# Altium PCB 74HC595_Pcb.PcbDoc
Units mil, origin at the board's own origin, x right, y up, seen from the top; angles counter-clockwise.
Board outline 600 x 800 mil, 2 copper layers (Top Layer, Bottom Layer); 4 components, 16 nets, 34 pads, 1 vias.
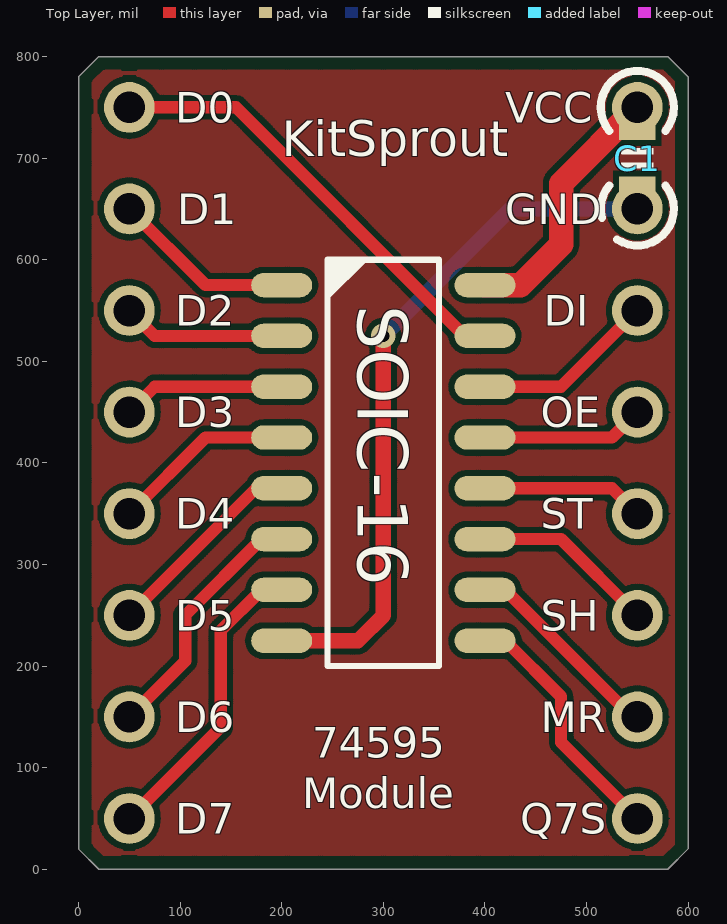
[diagram p0: Top Layer view]
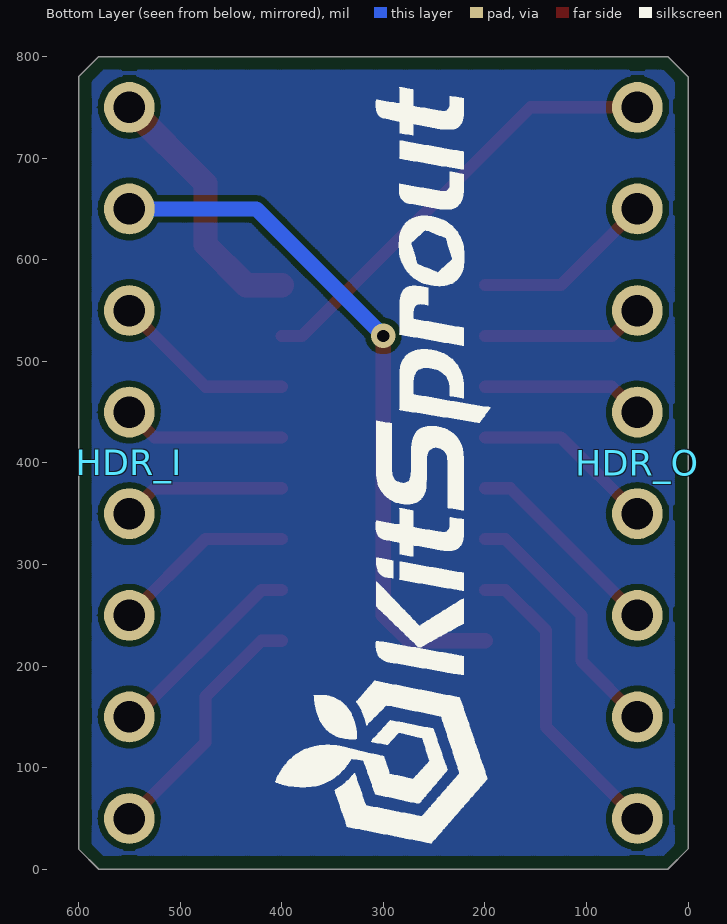
[diagram p1: Bottom Layer view, seen from below]

## Layer stack, top to bottom
Top Solder: solder mask 0.4, Solder Resist, Dk 3.5
Top Layer: signal copper 1.4
Dielectric1: dielectric 12.6, FR-4, Dk 4.8
Bottom Layer: signal copper 1.4
Bottom Solder: solder mask 0.4, Solder Resist, Dk 3.5

## Board outline
0,20 0,780 20,800 580,800 600,780 600,20 580,0 20,0

## Design rules (kind name [scope] priority, off if disabled: settings)
Clearance ClearancePolygon [InPolygon] p1: gap=6
Clearance [All] p2: gap=6
ComponentClearance [All] p1: gap=0 collisioncheckmode=3 verticalgap=0 showdistances=FALSE
Height [All] p1: minheight=0 maxheight=5000 prefheight=500
HoleToHoleClearance [All] p1: gap=6 allowstackedmicrovias=TRUE
MinimumSolderMaskSliver [All] p1: minsoldermaskwidth=6
PlaneConnect [All] p1: planeconnectstyle=Direct reliefexpansion=20 reliefentries=4 reliefconductorwidth=20 reliefairgap=10
PolygonConnect [All] p1: connectstyle=Direct reliefconductorwidth=20 reliefentries=4 polygonreliefangle="90 Angle" airgapwidth=10
RoutingVias [All] p1: holewidth=12 width=20 viastyle="Through Hole" minholewidth=12 minwidth=20 maxholewidth=100 maxwidth=200
SilkToSilkClearance [All] p1: silktosilkclearance=0
SilkToSolderMaskClearance SilkscreenOverComponentPads [IsPad] p1: minsilkscreentomaskgap=1 clearancetoexposedcopper=TRUE
SolderMaskExpansion [All] p1: expansion=2
Width [All] p1: maxlimit=30 minlimit=6 preferedwidth=10
22 further rules are at their usual default settings.

## Components (designator, comment, footprint, x,y, rotation, side; value= is the part's Value field where it differs from the comment)
C1 "Cap_0603" CAP_0603 550,700 r90 top
HDR_I "HDR1x8_2.54" HDR1X8_2.54_180 550,750 r180 bottom
HDR_O "HDR1x8_2.54" HDR1X8_2.54_180 50,750 r180 bottom
SOIC-16 "74HC595" SOIC_E150_16 300,400 r0 top (schematic designator 74S)

## Footprints (in the part's own frame and the unit in brackets; to place one, negate y for a bottom-side part, rotate by r counter-clockwise, add the part's x,y. Pads: shape width x height; smd on the part's side, far side on the other; paste and mask are expansions set on the pad)
CAP_0603 [mil]
  rect 28x36 smd: 1(-32,0) 2(32,0)
  silkscreen extent -10,-16 10,16, body extent -31,-16 32,16, height 36
HDR1X8_2.54_180 [mil]
  round 50 hole 31: 1(0,0) 2(0,-100) 3(0,-200) 4(0,-300) 5(0,-400) 6(0,-500) 7(0,-600) 8(0,-700)
  body extent -49,-750 49,50, height 323
SOIC_E150_16 [mil]
  oval 60x24 smd: 1(-100,175) 2(-100,125) 3(-100,75) 4(-100,25) 5(-100,-25) 6(-100,-75) 7(-100,-125) 8(-100,-175) 9(100,-175) 10(100,-125) 11(100,-75) 12(100,-25) 13(100,25) 14(100,75) 15(100,125) 16(100,175)
  silkscreen extent -55,-200 55,200, body extent -118,-197 118,197, height 69

## Part data
C1: "Capacitor"
HDR_I: library part HDR1x8_2.54T, "Header"
HDR_O: "Header"
SOIC-16: "74 Series"

## Via types
v1: diameter 24, hole 12, Top Layer to Bottom Layer, 1 vias

## Nets (pads, with @x,y where several pads share a name; then routed paths per layer and width w, separated by ;. In a path a pad name is that pad's centre, name@x,y a point inside that pad or via, vN(x,y) a via of type N, cw(c..) or ccw(c..) an arc to the next point about the centre after c; other vN are vias at no path point)
D0: HDR_O.1 SOIC-16.15 | length 443.2
  Top Layer w12: HDR_O.1 155,750 380,525 SOIC-16.15
D1: HDR_O.2 SOIC-16.1 | length 181.1
  Top Layer w12: HDR_O.2 125,575 SOIC-16.1
D2: HDR_O.3 SOIC-16.2 | length 160.4
  Top Layer w12: HDR_O.3 75,525 SOIC-16.2
D3: HDR_O.4 SOIC-16.3 | length 160.4
  Top Layer w12: HDR_O.4 75,475 SOIC-16.3
D4: HDR_O.5 SOIC-16.4 | length 181.1
  Top Layer w12: HDR_O.5 125,425 SOIC-16.4
D5: HDR_O.6 SOIC-16.5 | length 201.8
  Top Layer w12: HDR_O.6 175,375 SOIC-16.5
D6: HDR_O.7 SOIC-16.6 | length 248.8
  Top Layer w12: HDR_O.7 105,205 105,250 180,325 SOIC-16.6
D7: HDR_O.8 SOIC-16.7 | length 298.8
  Top Layer w12: HDR_O.8 140,140 140,235 180,275 SOIC-16.7
DIN: HDR_I.3 SOIC-16.14 | length 181.1
  Top Layer w12: SOIC-16.14 475,475 HDR_I.3
GND: C1.1 HDR_I.2 SOIC-16.8 | length 687.5
  Top Layer w15: SOIC-16.8@199.61,225 275,225 300,250 v1(300,525)
  Bottom Layer w15: v1(300,525) 425,650 HDR_I.2
MR: HDR_I.7 SOIC-16.10 | length 200.3
  Top Layer w12: SOIC-16.10 420,275 HDR_I.7@547.5,147.5
OE: HDR_I.4 SOIC-16.13 | length 160.4
  Top Layer w12: SOIC-16.13 525,425 HDR_I.4
Q7S: HDR_I.8 SOIC-16.9 | length 248.8
  Top Layer w12: SOIC-16.9 420,225 475,170 475,125 HDR_I.8
SH: HDR_I.6 SOIC-16.11 | length 181.1
  Top Layer w12: SOIC-16.11 475,325 HDR_I.6
ST: HDR_I.5 SOIC-16.12 | length 160.4
  Top Layer w12: SOIC-16.12 525,375 HDR_I.5
VCC: C1.2 HDR_I.1 SOIC-16.16 | length 257.6
  Top Layer w24: SOIC-16.16 435,575 475,615 475,675 HDR_I.1

## Polygon pours and split planes (outlines as drawn)
no net on Bottom Layer "Mechanical 1-No Net" (hatched 90Degree grid 2 track 4, remove dead copper, pour order 3): 25,785 75,785 575,785 585,775 585,765 585,25 575,15 545,15 25,15 15,25 15,55 15,775 25,785
no net on Top Layer "Mechanical 1-No Net" (hatched 90Degree grid 2 track 4, remove dead copper, pour order 4): 25,785 75,785 575,785 585,775 585,765 585,25 575,15 545,15 25,15 15,25 15,55 15,775 25,785

## Silkscreen, mask and mechanical layers (free items; w line width, h text height)
Top Overlay:
  lines w8: 515.07,641.27 cw(c550,650) 522.42,673.14 ; 522.42,726.86 cw(c550,750) 577.58,726.86 ; 530.03,620.05 ccw(c550,650) 577.58,673.14
  text "D0" at 95,735 h30
  text "VCC" at 420,735 h30
  text "KitSprout" at 200,690 h60
  text "D1" at 97,635 h30
  text "GND" at 420,635 h30
  text "D2" at 95,535 h30
  text "DI" at 458,535 h30
  text "D3" at 95,435 h30
  text "OE" at 455,435 h30
  text "D4" at 95,335 h30
  text "ST" at 455,335 h30
  text "D5" at 95,235 h30
  text "SH" at 455,235 h30
  text "D6" at 95,135 h30
  text "MR" at 455,135 h30
  text "74595" at 230,110 h30
  text "Module" at 220,60 h30
  text "D7" at 95,35 h30
  text "Q7S" at 435,35 h30
Bottom Overlay:
  drawing of 3294 lines, arcs and shapes, not listed
Mechanical 1:
  the board outline again, w2

## Dimensions
580,800 to 580,0 on Mechanical 13
0,780 to 600,780 on Mechanical 13